# Altium PCB Electronic_load.PcbDoc
Units mm, origin at the board's own origin, x right, y up, seen from the top; angles counter-clockwise.
Board outline 100 x 79.9 mm, 2 copper layers (Top Layer, Bottom Layer), stack 1.671 mm thick; 68 components, 70 nets, 271 pads, 116 vias.
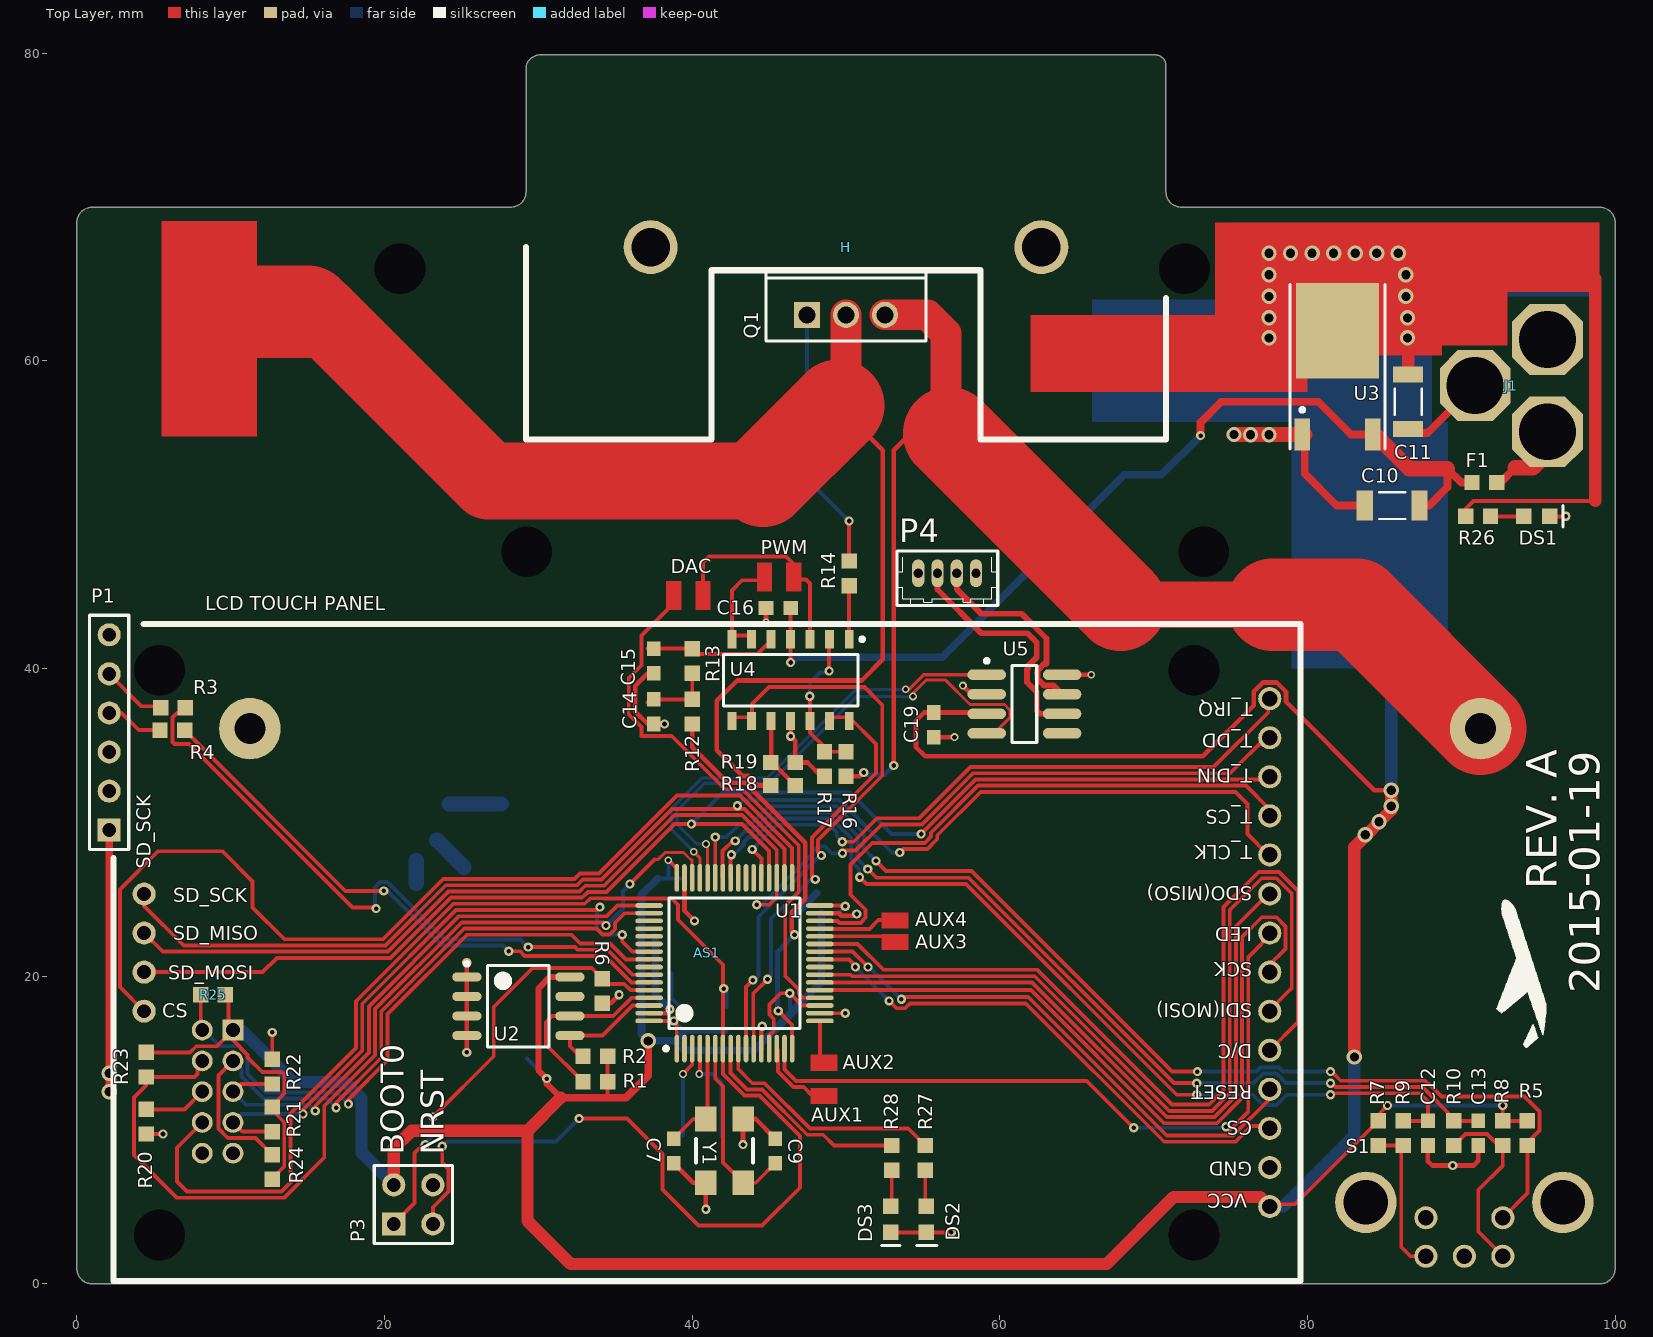
[diagram p0: Top Layer view]
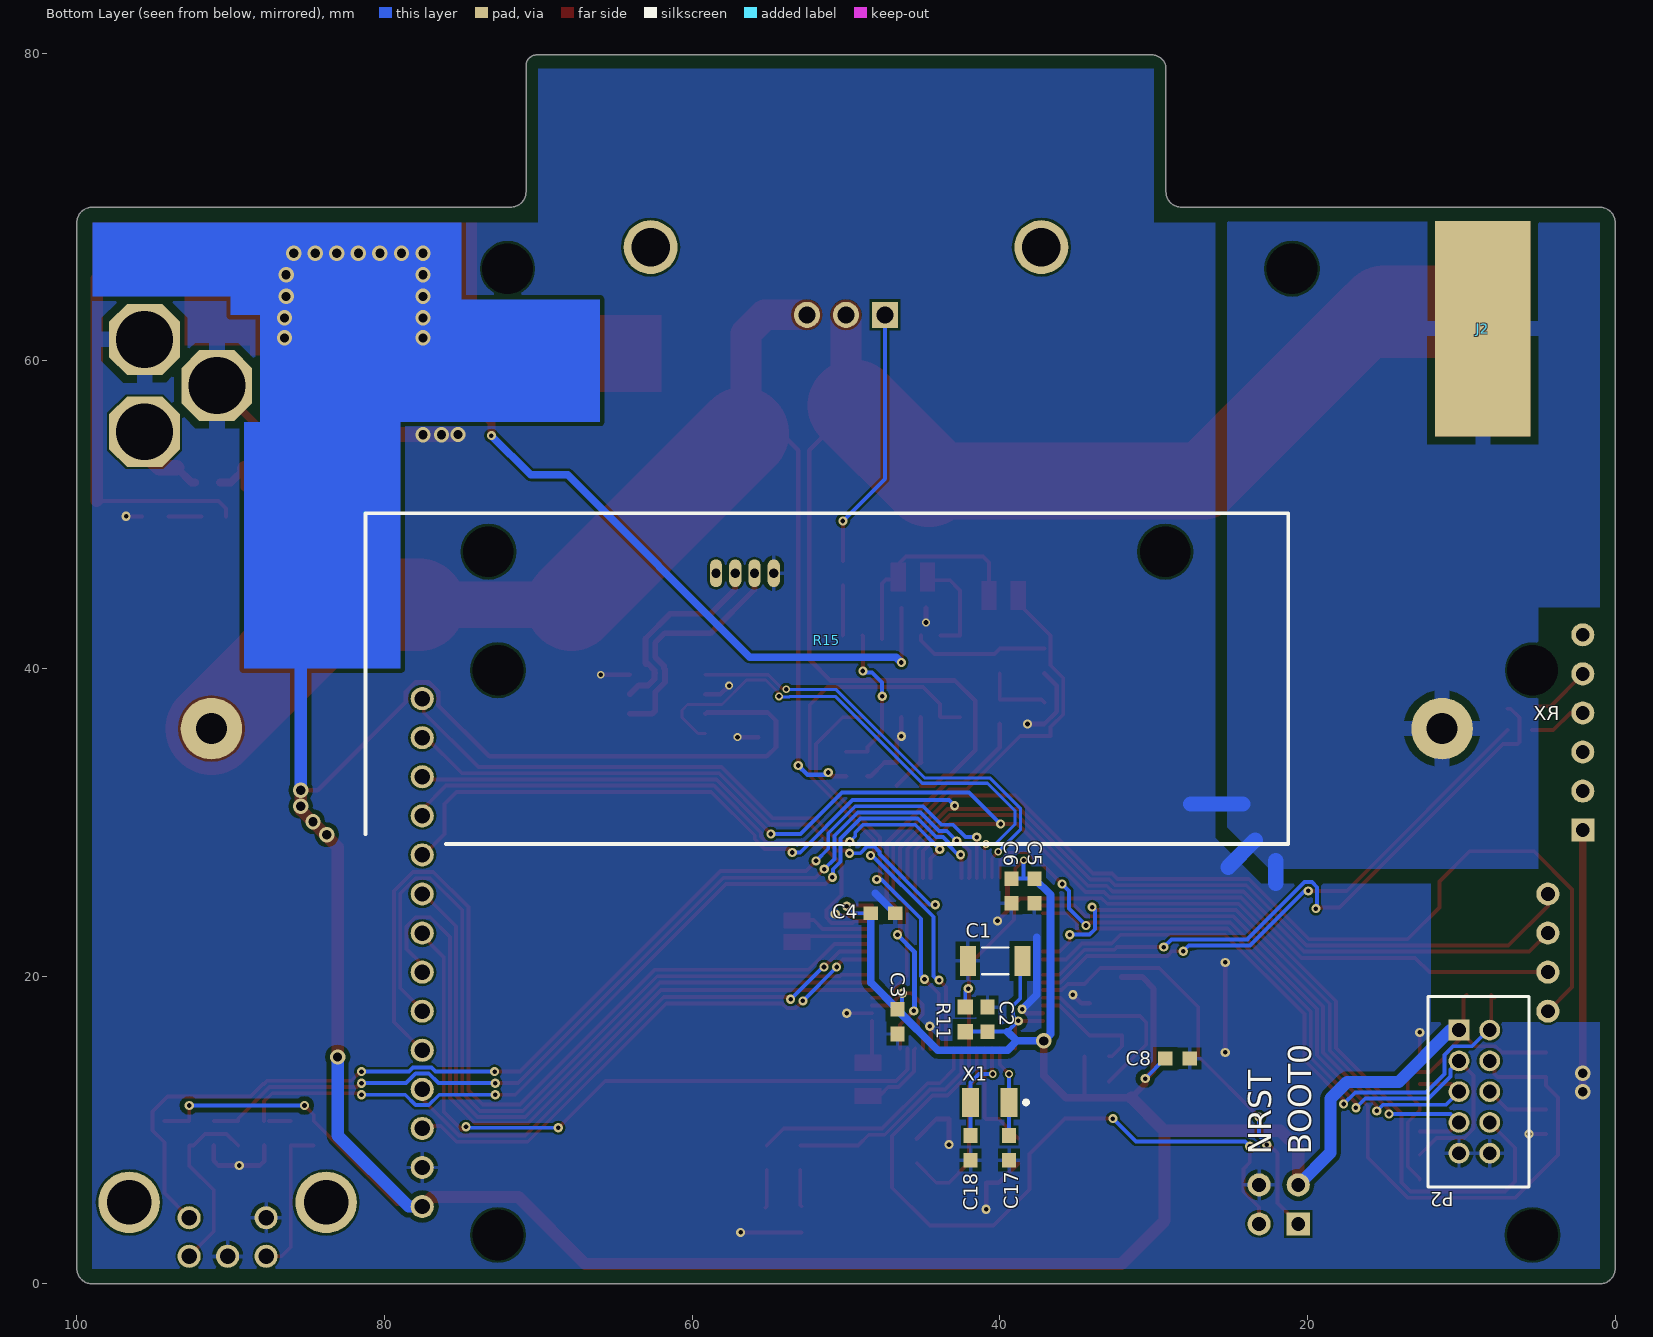
[diagram p1: Bottom Layer view, seen from below]

## Layer stack, top to bottom
Top Solder: solder mask 0.0102, Solder Resist, Dk 3.5
Top Layer: signal copper 0.0356
Dielectric 1: dielectric 1.6, FR-4, Dk 4.8
Bottom Layer: signal copper 0.0356
Bottom Solder: solder mask 0.0102, Solder Resist, Dk 3.5

## Board outline
1,0 cw(c1,1) 0,1 0,69 cw(c1,69) 1,70 28.2,70 ccw(c28.2,71) 29.2,71 29.2,79 cw(c30.1,79) 30.1,79.9 70.1,79.9 cw(c70.1,79.2) 70.8,79.2 70.8,71 ccw(c71.8,71) 71.8,70 99,70 cw(c99,69) 100,69 100,1 cw(c99,1) 99,0

## Design rules (kind name [scope] priority, off if disabled: settings)
Clearance Clearance_1 [InPolygon vs IsFill OR InPolygon OR InNet('3_3V')] p1: gap=0.3
Clearance [All] p2: gap=0.152
DiffPairsRouting [All] p1: maxlimit=0.254 minlimit=0.254 mostfreqgap=0.254 toplayer_minwidth=0.381 toplayer_maxwidth=0.381 toplayer_prefwidth=0.381 bottomlayer_minwidth=0.381 bottomlayer_maxwidth=0.381 bottomlayer_prefwidth=0.381 maxuncoupledlength=12.7
Height [All] p1: minheight=0 maxheight=100 prefheight=12.7
HoleSize [All] p1: absolutevalues=TRUE maxlimit=6.35 minlimit=0.3 maxpercent=80.000 minpercent=20.000
MinimumSolderMaskSliver [All] p1: minsoldermaskwidth=0.1
PolygonConnect PolygonConnect_2 [IsVia] p1: connectstyle=Direct reliefconductorwidth=0.254 reliefentries=4 polygonreliefangle="90 Angle" airgapwidth=0.254
PolygonConnect PolygonConnect_1 [InNet('GND') AND (InComponent('R15') OR InComponent('J2')  OR InComponent('J1'))] p2: connectstyle=Relief reliefconductorwidth=1 reliefentries=4 polygonreliefangle="90 Angle" airgapwidth=0.5
PolygonConnect [All] p3: connectstyle=Relief reliefconductorwidth=0.254 reliefentries=4 polygonreliefangle="90 Angle" airgapwidth=0.254
RoomDefinition Electronic_load_REVA [InComponentClass('Electronic_load_REVA')] p1: confinementstyle=ConfineOut formatcopy=TRUE lockcomponents=FALSE outline 108.2,89.3 197.2,89.3 197.2,113.1 108.2,113.1
RoutingVias [All] p1: holewidth=0.6 width=1 viastyle="Through Hole" minholewidth=0.3 minwidth=0.5 maxholewidth=6.3 maxwidth=7
SilkToSilkClearance [All] p1: silktosilkclearance=0
SilkToSolderMaskClearance [IsPad] p1: minsilkscreentomaskgap=0.2 clearancetoexposedcopper=TRUE
SolderMaskExpansion [All] p1: expansion=0.13
Width [All] p1: maxlimit=6 minlimit=0.152 preferedwidth=0.25
23 further rules are at their usual default settings.

## Classes and differential pairs
differential pair CAN: +CAN_P -CAN_N

## Components (designator, comment, footprint, x,y, rotation, side; value= is the part's Value field where it differs from the comment)
AS1 "LCD_TOUCH_DISPLAY" LCD_SPI 79.55,19 r90 top locked
C1 "Cap" 1206_CAP 40.3,21 r0 bottom
C2 "Cap" 0603_CAP 40.8,17.2 r90 bottom
C3 "Cap" 0603_CAP 46.65,17.05 r270 bottom
C4 "Cap" 0603_CAP 47.6,24.1 r180 bottom
C5 "Cap" 0603_CAP 37.75,25.55 r270 bottom
C6 "Cap" 0603_CAP 39.25,25.55 r270 bottom
C7 "Cap" 0603_CAP 38.8,8.65 r270 top
C8 "Cap" 0603_CAP 28.45,14.65 r0 bottom
C9 "Cap" 0603_CAP 45.4,8.65 r90 top
C10 "Cap" 1206_CAP 85.5,50.6 r180 top
C11 "Cap" 1206_CAP 86.55,57.35 r270 top
C12 "ap" 0603_CAP 87.825,9.8 r90 top
C13 "ap" 0603_CAP 91.1,9.8 r90 top
C14 "Cap" 0603_CAP 37.5,37.2 r90 top
C15 "Cap" 0603_CAP 37.5,40.5 r90 top
C16 "Cap" 0603_CAP 45.6,43.95 r180 top
C17 "Cap" 0603_CAP 39.4,8.85 r90 bottom
C18 "Cap" 0603_CAP 41.9,8.85 r90 bottom
C19 "Cap" 0603_CAP 55.7,36.35 r90 top
DS1 "APG1608CGKC/T" KING-LED0603-25-GREEN_V 94.9,49.9 r180 top
DS2 "KP-1608SYCK" KING-0603LED_YELLOW_V 55.224,4.2 r90 top
DS3 "KP-1608SYCK" KING-0603LED_YELLOW_V 52.9,4.2 r90 top
F1 "Fuse" 0603_RES 91.5,52.1 r180 top
H "HeatSink" Heat_Sink 50,67.4 r0 top locked
J1 "DC_JACK" DC_JACK_6.3MM 95.6,58.4 r180 top locked
J2 "Socket" PIN1 8.6,62.1 r0 top
P1 "USART1" HDR1X6 2.1,29.5 r90 top
P2 "LTMM-105-02-TX-D" SMTC-LTMM-105-02-XX-D 10.15,16.5 r270 bottom
P3 "Header 2X2" HDR2X2 20.6,3.9 r0 top
P4 "DF13-4P-1.25DSA" DF13-4P-1.25DSA 55.95,46.2 r0 top
Q1 "FQP19N20C" TO220V 50,63 r0 top locked
R1 "Res" 0603_RES 33.7,13.15 r180 top
R2 "Res" 0603_RES 33.7,14.8 r0 top
R3 "Res" 0603_RES 6.25,37.45 r0 top
R4 "Res" 0603_RES 6.2,36 r0 top
R5 "Res" 0603_RES 94.3,9.8 r90 top
R6 "Res" 0603_RES 34.15,19.05 r270 top
R7 "Res" 0603_RES 84.6,9.8 r90 top
R8 "Res" 0603_RES 92.7,9.8 r270 top
R9 "Res" 0603_RES 86.237,9.8 r90 top
R10 "Res" 0603_RES 89.512,9.8 r90 top
R11 "Res" 0603_RES 42.25,17.2 r270 bottom
R12 "Res" 0603_RES 40,37.2 r90 top
R13 "Res" 0603_RES 40,40.5 r90 top
R14 "Res" 0603_RES 50.2,46.2 r90 top
R15 "Res" 100W_RES 51.25,36.1 r0 bottom locked
R16 "Res" 0603_RES 50,33.8 r90 top
R17 "Res" 0603_RES 48.6,33.8 r90 top
R18 "Res" 0603_RES 45.9,32.4 r0 top
R19 "Res" 0603_RES 45.9,33.9 r0 top
R20 "Res" 0603_RES 4.5,10.55 r90 top
R21 "Res" 0603_RES 12.7,10.7 r90 top
R22 "Res" 0603_RES 12.7,13.8 r270 top
R23 "Res" 0603_RES 4.5,14.25 r270 top
R24 "Res" 0603_RES 12.7,7.6 r90 top
R25 "Res" 0603_RES 8.85,18.8 r180 top
R26 "Res" 0603_RES 91.1,49.9 r180 top
R27 "Res" 0603_RES 55.148,8.2 r90 top
R28 "Res" 0603_RES 52.976,8.2 r90 top
S1 "PEC12R-2xxxF-Sxxxx" ROTARY_ENCODER_VER 90.2,1.8 r0 top locked
U1 "STM32F103RCT6" LQFP64_N 42.75,20.85 r90 top locked
U2 "24LC32AT-I/SM" SOIJ-SM8_L 28.7,18.05 r0 top
U3 "NCP1117DT33RKG" TO-252 81.95,58.6 r0 top
U4 "LM324ADR2G" ONSC-SOIC-14-751A-03_V 46.4,39.25 r270 top
U5 "CAN bus transiver" SOIC127P600X175-8M 61.6,37.7 r0 top
X1 "ABS07-32.768KHz-T" ABRA-ABS07-2_V 40.65,11.8 r0 bottom
Y1 "ABM3B-25.000MHZ-B2-T" ABRA-ABM3B-4_V 42.1,8.65 r90 top

## Footprints (in the part's own frame and the unit in brackets; to place one, negate y for a bottom-side part, rotate by r counter-clockwise, add the part's x,y. Pads: shape width x height; smd on the part's side, far side on the other; paste and mask are expansions set on the pad)
100W_RES [mm]
  rrect50% 0x0 hole 3.3 unplated: 0(-22,-11.5) 0(22,-11.5)
  round 4 hole 2: 1(-40,0) 2(40,0)
  silkscreen extent -30,-14 30,7.5
0603_CAP [mm]
  rect 0.95x0.9 smd: 1(-0.8,0) 2(0.8,0)
  body extent -0.8,-0.39 0.8,0.41, height 0.7
0603_RES [mm] "Chip Resistor, 2-Leads, Body 1,57x0,85mm, IPC Medium Density"
  rect 1x1 smd: 1(-0.8,0) 2(0.8,0)
  body extent -0.85,-0.42 0.75,0.43, height 0.45
1206_CAP [mm] "Chip Capacitor, 2-Leads, Body 3,20x1,60mm, IPC Low Density"
  rect 1.05x1.95 smd: 1(-1.775,0) 2(1.775,0)
  silkscreen extent -0.85,-0.87 0.85,0.87, body extent -1.6,-0.8 1.6,0.8, height 1.6
ABRA-ABM3B-4_V [mil] "SMT Crystal, 4-Leads, Body 5.2x3.4mm"
  rect 63x55 smd: 1(-81.5,-47.5) 2(81.5,-47.5) 3(81.5,47.5) 4(-81.5,47.5)
  silkscreen extent -31,-72 31,72, body extent -114,-52 113,51, height 39
ABRA-ABS07-2_V [mm] "Hand Drawn, 2-Leads, Body 3.2x1.5mm, Pitch 2.5mm"
  rect 1.1x1.9 smd: 1(-1.25,0) 2(1.25,0)
  silkscreen extent -2.47,-0.12 -2.22,0.12, body extent -1.6,-0.75 1.6,0.75, height 0.9
DC_JACK_6.3MM [mm]
  oct 4.6x4.6 hole 3.7: 1(0,3) 2(0,-3) 3(4.7,0)
  body extent -6.4,-10.6 8,4.5, height 11
DF13-4P-1.25DSA [mm]
  oval 0.8x1.8 hole 0.6: 1(2.5,0) 2(1.25,0) 3(0,0) 4(-1.25,0)
  silkscreen extent -2.64,-2.13 3.91,1.45, body extent -2.68,-2.2 3.98,1.2, height 4.32
HDR1X6 [mm] "Connector; Header; 6 Position"
  rect 1.5x1.5 hole 0.9: 1(0,0)
  round 1.5 hole 0.9: 2(2.54,0) 3(5.08,0) 4(7.62,0) 5(10.16,0) 6(12.7,0)
  silkscreen extent -1.27,-1.27 13.97,1.27
HDR2X2 [mm] "Connector; Header; 2x2 Position"
  rect 1.5x1.5 hole 0.9: 1(0,0)
  round 1.5 hole 0.9: 2(0,2.54) 3(2.54,0) 4(2.54,2.54)
  silkscreen extent -1.27,-1.27 3.81,3.81
Heat_Sink [mm]
  round 3.5 hole 2.5: 0(-12.7,0) 0(12.7,0)
  silkscreen extent -20.8,-12.5 20.8,0, body extent -20.8,-12.6 20.8,12.53, height 63.5
KING-0603LED_YELLOW_V [mm] "SMT LED, 2-Leads, Body 1.6x0.8mm (0603-Size)"
  rect 1x1 smd paste+0 mask+0: 1(0.85,0) 2(-0.85,0)
  body extent -0.92,-0.53 1.09,0.53, height 1.1
KING-LED0603-25-GREEN_V [mm] "LED, SMT, Body 1.6 x 0.8 mm, 0.25mm Thickness"
  rect 1x1 smd paste+0 mask+0: 1(0.85,0) 2(-0.85,0)
  body extent -0.8,-0.4 0.8,0.4, height 0.25
LCD_SPI [mm] "http://www.ebay.co.uk/itm/240x320-2-4-SPI-TFT-LCD-Touch-Panel-Serial-Port-Module-with-PBC-ILI9341-5V-3-3V-/121414443081?pt=UK_BOI_Electrical_Components_Supplies_ET&hash=item1c44dd6049"
  round 0 hole 3.3 unplated: 0(-15.82,74.18) 0(-15.82,6.92) 0(20.9,74.18) 0(20.9,6.92)
  round 1.5 hole 1: 1(-13.97,2) 2(-11.43,2) 3(-8.89,2) 4(-6.35,2) 5(-3.81,2) 6(-1.27,2) 7(1.27,2) 8(3.81,2) 9(6.35,2) 10(8.89,2) 11(11.43,2) 12(13.97,2) 13(16.51,2) 14(19.05,2)
  round 1.5 hole 0.9: 15(-1.27,75.18) 16(1.27,75.18) 17(3.81,75.18) 18(6.35,75.18)
  silkscreen extent -18.82,0 23.9,77.18, body extent -18.85,-0.02 23.9,77.18, height 6
LQFP64_N [mm] "Thin QFP, 64-Leads, Body 10x10mm, Pitch 0.5mm, IPC Medium Density"
  oval 1.8x0.3 smd mask+0.05: 1(-5.55,3.75) 2(-5.55,3.25) 3(-5.55,2.75) 4(-5.55,2.25) 5(-5.55,1.75) 6(-5.55,1.25) 7(-5.55,0.75) 8(-5.55,0.25) 9(-5.55,-0.25) 10(-5.55,-0.75) 11(-5.55,-1.25) 12(-5.55,-1.75) 13(-5.55,-2.25) 14(-5.55,-2.75) 15(-5.55,-3.25) 16(-5.55,-3.75) 33(5.55,-3.75) 34(5.55,-3.25) 35(5.55,-2.75) 36(5.55,-2.25) 37(5.55,-1.75) 38(5.55,-1.25) 39(5.55,-0.75) 40(5.55,-0.25) 41(5.55,0.25) 42(5.55,0.75) 43(5.55,1.25) 44(5.55,1.75) 45(5.55,2.25) 46(5.55,2.75) 47(5.55,3.25) 48(5.55,3.75)
  oval 0.3x1.8 smd mask+0.05: 17(-3.75,-5.55) 18(-3.25,-5.55) 19(-2.75,-5.55) 20(-2.25,-5.55) 21(-1.75,-5.55) 22(-1.25,-5.55) 23(-0.75,-5.55) 24(-0.25,-5.55) 25(0.25,-5.55) 26(0.75,-5.55) 27(1.25,-5.55) 28(1.75,-5.55) 29(2.25,-5.55) 30(2.75,-5.55) 31(3.25,-5.55) 32(3.75,-5.55) 49(3.75,5.55) 50(3.25,5.55) 51(2.75,5.55) 52(2.25,5.55) 53(1.75,5.55) 54(1.25,5.55) 55(0.75,5.55) 56(0.25,5.55) 57(-0.25,5.55) 58(-0.75,5.55) 59(-1.25,5.55) 60(-1.75,5.55) 61(-2.25,5.55) 62(-2.75,5.55) 63(-3.25,5.55) 64(-3.75,5.55)
  silkscreen extent -5.67,-4.25 4.25,4.57, body extent -5,-5 5,5, height 1.6
ONSC-SOIC-14-751A-03_V [mm] "SOIC, 14-Leads, Body 8.75x4mm, Pitch 1.27mm"
  rect 1.18x0.58 smd: 1(-2.66,3.81) 2(-2.66,2.54) 3(-2.66,1.27) 4(-2.66,0) 5(-2.66,-1.27) 6(-2.66,-2.54) 7(-2.66,-3.81) 8(2.66,-3.81) 9(2.66,-2.54) 10(2.66,-1.27) 11(2.66,0) 12(2.66,1.27) 13(2.66,2.54) 14(2.66,3.81)
  silkscreen extent -2.78,-4.38 1.67,4.78, body extent -2,-4.38 2,4.38, height 1.75
PIN1 [mm] "Connector; Plug"
  rect 6.2x14 smd far side: 1(0,0)
ROTARY_ENCODER_VER [mm]
  round 4 hole 2.9: 0(-6.4,3.5) 0(6.4,3.5)
  round 1.5 hole 1: 1(-2.5,2.5) 2(2.5,2.5) A(-2.5,0) B(2.5,0) C(0,0)
SMTC-LTMM-105-02-XX-D [mm] "Shrouded Header & Stacker, 2x5 Pins, Vertical, 2mm Pitch, Male"
  rect 1.35x1.35 hole 0.9: 1(0,0)
  round 1.35 hole 0.9: 2(0,2) 3(2,0) 4(2,2) 5(4,0) 6(4,2) 7(6,0) 8(6,2) 9(8,0) 10(8,2)
  silkscreen extent -2.19,-2.01 10.19,4.55, body extent -2.19,-2.01 10.19,4.52, height 4.83
SOIC127P600X175-8M [mm] "SOIC, 8-Leads, Body 4,90x3,90mm, Pitch 1,27mm, IPC Low Density"
  oval 2.5x0.7 smd: 1(-2.45,1.905) 2(-2.45,0.635) 3(-2.45,-0.635) 4(-2.45,-1.905) 5(2.45,-1.905) 6(2.45,-0.635) 7(2.45,0.635) 8(2.45,1.905)
  silkscreen extent -2.57,-2.5 0.8,2.93, body extent -2,-2.5 2,2.5, height 1.75
SOIJ-SM8_L [mm] "SOP, 8-Leads, Body 5.2x5.2mm, Pitch 1.27mm, IPC High Density"
  oval 1.9x0.6 smd: 1(-3.35,1.905) 2(-3.35,0.635) 3(-3.35,-0.635) 4(-3.35,-1.905) 5(3.35,-1.905) 6(3.35,-0.635) 7(3.35,0.635) 8(3.35,1.905)
  silkscreen extent -3.47,-2.65 2,2.88, body extent -2.69,-2.67 2.69,2.67, height 2.04
TO220V [mm] "TO, Thru-Hole, Vertical, Heatsink Mounted; 3 In-Line Leads; Pitch 2.54 mm; Pin sequence 1, 3, 2"
  round 1.7 hole 1.1: D(0,0) S(2.54,0)
  rect 1.7x1.7 hole 1.1: G(-2.54,0)
  silkscreen extent -5.2,-1.7 5.2,2.9, body extent -5.21,-1.46 5.21,3, height 18.8
TO-252 [mm] "D-PAK/TO-252-AA; 3 Leads (1 Cropped); Body 10.1 (inc. leads) x 6.6 mm (LxW max)"
  rect 1x2.1 smd: 1(-2.285,-3.375) 3(2.285,-3.375)
  rect 5.4x6.2 smd: 4(0,3.375)
  silkscreen extent -3.09,-4.32 3.09,6.38

## Part data
AS1: library part LCD_SPI, "http://www.ebay.co.uk/itm/240x320-2-4-SPI-TFT-LCD-Touch-Panel-Serial-Port-Module-with-PBC-ILI9341-5V-3-3V-/121414443081?pt=UK_BOI_Electrical_Components_Supplies_ET&hash=item1c44dd6049"
C1 C2 C3 C4 C5 C6 C7 C8 C9 C10 C11 C14 C15 C16 C17 C18: "Capacitor"
C12 C13: library part Cap, "Capacitor"
DS1: library part CMP-0239-00001-1, "LED, SMT, 0603(1608), 0.25mm Thickness, Green"
DS2 DS3: library part CMP-0404-00003-1, "LED, SMT, 0603(1608), 1.1mm thickness, Yellow"
P1: library part "Header 6", "Header, 6-Pin"
P2: library part CMP-1028-00010-1, "Shrouded Header & Stacker, Through-Hole, Vertical, -55 to 105 degC, 2 mm Pitch, 10-Pin, Male, RoHS"
P3: "Header, 2-Pin, Dual row"
Q1: library part "MOSSFET N-Channel", "N-channel MOSFET"
U1: library part CMP-0237-00009-2, "STM32 ARM-based 32-bit MCU Performance Line with 256 kB Flash, 48 kB Internal RAM, -40 to +85°C Temperature, 64-Pin LQFP, Tray"
U2: library part CMP-0159-00548-1, "32Kbit, 400kHz, 2.5V, I2C Serial EEPROM, 8-Pin SOIC 208mil, Industrial Temperature, Tape and Reel"
U3: library part Linear
U4: library part CMP-1310-00169-1, "Single Supply Quad Operational Amplifier, 3 to 32 V, 0 to 70 degC, 14-Pin SOIC, Pb-Free, Tape and Reel"
U5: library part MAX3051
X1: library part CMP-0447-00001-2, "Crystal, 32.768 kHz, 12.5 pF, -40 to 85 degC, SMD Low Profile 3.2 x 1.5 x 0.9 mm, Tape and Reel"
Y1: library part CMP-0277-00001-1, "Crystal, SMD, 25.000000MHz Stab=50ppm 18.0pF"

## Free pads (board coordinates)
  round 0 hole 3.3 unplated: 2(21,66) 4(72,66)

## Via types
v1: diameter 0.6, hole 0.3, Top Layer to Bottom Layer, tented both sides, 79 vias
v2: diameter 1, hole 0.6, Top Layer to Bottom Layer, tented both sides, 26 vias
v3: diameter 0.5, hole 0.3, Top Layer to Bottom Layer, tented both sides, 11 vias

## Nets (pads, with @x,y where several pads share a name; then routed paths per layer and width w, separated by ;. In a path a pad name is that pad's centre, name@x,y a point inside that pad or via, vN(x,y) a via of type N, cw(c..) or ccw(c..) an arc to the next point about the centre after c; other vN are vias at no path point)
3_3V: AS1.1 C1.1 C2.1 C3.1 C4.1 C5.1 C6.1 C8.2 C11.1 C19.2 P2.1 P3.2 R1.1 R2.2 R5.2 R7.2 R8.1 R11.2 R21.2 R23.1 R24.1 R25.1 R26.2 U1.1 U1.13 U1.19 U1.32 U1.48 U1.64 U2.8 U3.4 U5.3 | length 319.4
  Top Layer w0.25: R23.1 7.353,15.05 7.756,15.452 9.102,15.452 P2.1@9.85,16.2 ; R25.1 9.85,18.6 P2.1@9.85,16.2 ; R24.1 12.7,6.845 13.477,7.623 13.477,10.515 12.7,11.292 R21.2 12.7,11.608 13.477,12.385 13.477,13.615 13.315,13.777 12.05,13.777 11.102,14.725 11.102,14.894 10.15,15.847 P2.1 P2.1@9.85,16.2 ; 34.5,12.1 R1.1 R2.2 ; U1.64 v1(38.8,17.1) 39,16.9 U1.1 ; v3(38.45,27.55) 39,27 U1.48 ; U1.13 45,16.154 45.3,16.454 45.3,17.233 45.023,17.511 45.023,18.173 45.75,18.9 v1(46.35,18.9) 47.15,18.1 U1.19 ; U1.32 49.9,24.6 v1(49.95,24.55) ; AS1.1@77.7,5.18 79.18,5.18 R7.2 84.6,11 v1(85.2,11.6) ; R26.2 90.3,50.4 90.8,50.9 98.7,50.9 ; v1(92.7,11.6) R8.1 R5.2
  Top Layer w0.3: U5.3 59.065,37.15 C19.2 55.1,37.15 54.55,36.6 54.55,34.9 55.15,34.3 73.2,34.3 76.506,37.606 76.498,37.614 76.498,38.486 77.114,39.102 77.986,39.102 78.602,38.486 78.602,37.848 84.35,32.1 v2(85.45,32.1)
  Top Layer w0.4: 31.45,12.1 30.55,13 v1(30.55,13.35) 30,13.9 30,19.2 30.755,19.955 U2.8
  Top Layer w0.5: 31.45,12.1 34.5,12.1 35.7,12.1 37.15,13.55 v2(37.15,15.8)
  Top Layer w0.8: P3.2 20.6,8.8 21.75,9.95 29.3,9.95 ; 31.45,12.1 29.3,9.95 ; AS1.1@77.7,5.18 AS1.1 76.93,5.65 71.3,5.65 66.95,1.3 32.1,1.3 29.3,4.1 29.3,9.95 ; v2(83.05,14.75) 83.05,28.4 85.45,30.8 v2(85.45,31.05) v2(85.45,32.1) ; C11.1 86.55,60.65 ; 98.55,65.5 98.7,65.35 98.7,50.9
  Bottom Layer w0.25: C8.2 v1(30.55,13.35) ; C5.1 38.5,26.35 ; v3(38.45,27.55) 38.45,26.4 38.5,26.35 ; C1.1@38.675,20.2 38.675,18.546 39.13,18.092 39.13,17.43 v1(38.8,17.1) 39.5,16.4 C2.1 R11.2 ; C6.1 38.5,26.35 ; C3.1@46.35,17.9 v1(46.35,18.9) ; C4.1 49.5,24.1 v1(49.95,24.55) ; v1(85.2,11.6) v1(92.7,11.6)
  Bottom Layer w0.5: C5.1 36.7,25.3 36.7,16.25 v2(37.15,15.8) 38.9,15.8 ; 39.5,16.4 38.9,15.8 ; C4.1 48.4,19.6 C3.1 46.65,17.807 44.043,15.2 39.5,15.2 38.9,15.8
  Bottom Layer w0.8: P2.1 10.7,16.5 14.068,13.132 17.423,13.132 18.502,12.053 18.502,8.538 P3.2 ; AS1.1 78.43,5.03 83.05,9.65 v2(83.05,14.75) ; v2(85.45,32.1) 85.45,41.65
  other v2: 83.75,29.2 84.65,30.05 77.5,61.5 86.5,61.5 77.5,62.8 86.5,62.8 77.5,64.2 86.4,64.2 77.5,65.6 86.4,65.6 77.5,67 78.9,67 80.3,67 81.7,67 83.1,67 84.5,67 85.9,67
5V: P1.3
12V_DC: C10.1 C16.1 F1.2 U3.3 U4.4 | length 61.1
  Top Layer w0.25: v1(46.4,40.4) U4.4 C16.1
  Top Layer w0.5: v1(73.05,55.15) 73.05,56 74.4,57.35 80.7,57.35 82.825,55.225 U3.3@84.385,55.225 ; C10.1 87.9,50.6 89.1,51.8 89.1,53 90,52.1 F1.2
  Top Layer w1: U3.3@84.385,55.225 86.61,53 89.1,53
  Bottom Layer w0.5: v1(46.4,40.4) 46.75,40.75 56.25,40.75 68.1,52.6 70.5,52.6 v1(73.05,55.15)
AUX1: U1.14 | length 4.4
  Top Layer w0.25: U1.14 45.573,15.227 45.573,13.808 46.583,12.798 47.252,12.798 47.8,12.25
AUX2: U1.17 | length 2.6
  Top Layer w0.25: 48.3,14.5 U1.17
AUX3: U1.28 | length 4.2
  Top Layer w0.25: U1.28 52.45,22.6
AUX4: U1.29 | length 5.1
  Top Layer w0.25: U1.29 48.33,23.07 51.52,23.07 52.1,23.65 53.15,23.65
BOOT0: P3.1 R6.1 U1.60 | length 28.6
  Top Layer w0.25: P3.1 21.95,5.25 21.95,8.5 22.5,9.05 v1(22.65,9.05) ; v1(23.15,10.85) 27.1,14.8 27.1,18 29.632,20.532 33.468,20.532 R6.1 34.5,19.5 35.581,19.5 35.981,19.1 U1.60
  Bottom Layer w0.25: v1(22.65,9.05) 22.65,9.15 23.15,9.65 v1(23.15,10.85)
CAN_N: P4.3 U5.6 | length 15.6
  Top Layer w0.381: P4.3 55.95,45.15 58.8,42.3 61.8,42.3 62.4,41.7 62.4,40.733 61.822,40.155 61.822,40.02 61.765,39.963 61.765,39.112 62.4,38.477 62.4,37.265 62.6,37.065 U5.6
CAN_P: P4.2 U5.7 | length 13.2
  Top Layer w0.381: P4.2 57.2,45.17 58.8,43.57 61.428,43.57 63.035,41.963 63.035,40.335 62.998,40.298 62.863,40.298 62.457,39.892 62.457,39.757 62.4,39.7 62.457,39.643 62.457,39.318 62.863,38.912 63.473,38.912 U5.7
CANRX: U1.44 U5.4 | length 34.1
  Top Layer w0.2: v3(40.9,28.6) 41,28.5 U1.44 ; v3(54.355,38.195) 54.355,38.407 55.201,39.253 56.48,39.253 58.066,37.667 60.3,37.667 60.652,37.315 60.652,36.815 59.632,35.795 U5.4
  Bottom Layer w0.2: v3(40.9,28.6) 40.3,28.6 39,29.9 39,30.75 40.798,32.548 45.046,32.548 50.693,38.195 53.645,38.195 53.686,38.154 54.314,38.154 v3(54.355,38.195)
CANTX: U1.45 U5.1 | length 29.4
  Top Layer w0.2: v3(40.1,28.1) 40.5,27.7 U1.45 ; v3(53.894,38.656) 54.106,38.656 55.055,39.605 U5.1
  Bottom Layer w0.2: v3(40.1,28.1) 38.648,29.552 38.648,30.896 40.652,32.9 44.9,32.9 50.656,38.656 v3(53.894,38.656)
CTS: P1.2
CURR_DAC: U1.20 | length 35
  Top Layer w0.25: 38.65,44.1 36.698,42.148 36.698,41.133 36.7,41.131 36.7,40.217 35.873,39.39 35.873,37.023 36.7,36.196 36.7,35.623 38.673,35.623 42.141,32.155 43.264,32.155 46.927,28.492 46.927,25.473 46.05,24.596 46.05,20.017 46.927,19.139 46.927,18.892 47.219,18.6 U1.20
CURR_MES: U1.11 U4.13 U4.14 | length 27.2
  Top Layer w0.25: U1.11 44,16.483 43.973,16.511 43.973,18.873 v1(44.9,19.8) ; v1(48,26.3) 47.782,26.518 47.782,29.032 51.95,33.2 51.95,35.1 50.21,36.84 U4.13@48.94,36.84
  Bottom Layer w0.25: v1(44.9,19.8) 45.123,20.023 45.123,23.74 47.683,26.3 v1(48,26.3)
CURR_PWM: R12.1 U1.16 | length 26.1
  Top Layer w0.25: v1(45.6,17.75) 46.5,16.85 U1.16
  Top Layer w0.3: R12.1 40,34.9 42.318,32.582 43.441,32.582 47.355,28.669 47.355,25.045 46.477,24.167 46.477,22.872 v1(46.65,22.7)
  Bottom Layer w0.25: v1@45.55,17.8 v1(45.6,17.75)
  Bottom Layer w0.3: v1@45.55,17.8 45.55,21.6 v1(46.65,22.7)
DC: AS1.5 U1.27 | length 60.3
  Top Layer w0.25: U1.27 50.75,22.1 52.42,20.43 62.408,20.43 71.183,11.655 73.617,11.655 74.545,12.583 74.545,24.495 76.83,26.78 78.142,26.78 79.382,25.54 79.382,17.022 AS1.5
EN_A: C12.2 R9.2 U1.41 | length 60
  Top Layer w0.25: U1.41 42.5,27.85 v1(42.55,27.9) ; v1(50.886,26.436) 51.322,26 57.8,26 71.5,12.3 v1(72.8,12.3) ; v1(81.5,12.3) 81.6,12.4 81.9,12.4 87.3,12.4 87.825,11.875 C12.2 ; R9.2@86.1,10.6 R9.2 C12.2@87.5,10.6
  Bottom Layer w0.25: v1(42.55,27.9) 42.717,27.9 43.377,28.561 43.377,28.727 43.7,29.05 44.131,29.05 45.333,30.252 49.067,30.252 50.35,28.969 50.35,27.45 50.841,26.959 50.841,26.481 v1(50.886,26.436) ; v1(72.8,12.3) 76.447,12.3 77.124,11.623 77.976,11.623 78.653,12.3 v1(81.5,12.3)
EN_B: C13.2 R10.2 U1.42 | length 61.7
  Top Layer w0.25: U1.42 41.973,26.427 41.973,28.139 42.633,28.8 v1(42.8,28.8) ; v1(51.418,26.968) 51.984,26.402 57.967,26.402 71.317,13.052 v1(72.802,13.052) ; v1(81.5,13.052) 81.564,13.052 81.814,12.802 87.467,12.802 89.512,10.757 R10.2 C13.2
  Bottom Layer w0.25: v1(42.8,28.8) 43.452,29.452 43.964,29.452 45.167,30.655 49.233,30.655 50.752,29.136 50.752,27.634 v1(51.418,26.968) ; v1(72.802,13.052) 76.499,13.052 77.124,13.677 77.976,13.677 78.601,13.052 v1(81.5,13.052)
EN_SW: R5.1 S1.2 U1.43 | length 74
  Top Layer w0.25: U1.43 v1(41.5,29.05) ; v1(51.95,27.5) 52.601,26.849 58.151,26.849 71.195,13.805 v1(72.845,13.805) ; v1(81.5,13.805) 81.564,13.805 82.164,13.205 87.633,13.205 87.838,13 87.9,13 88.723,12.177 94.115,12.177 95.077,11.215 95.077,9.985 94.3,9.208 R5.1 94.3,5.9 S1.2
  Bottom Layer w0.25: v1(41.5,29.05) 42.233,29.05 43.038,29.855 43.798,29.855 45,31.057 49.4,31.057 51.155,29.302 51.155,28.295 v1(51.95,27.5) ; v1(72.845,13.805) 76.683,13.805 76.958,14.08 78.142,14.08 78.417,13.805 v1(81.5,13.805)
GND: AS1.2 C1.2 C2.2 C3.2 C4.2 C5.2 C6.2 C7.2 C8.1 C9.2 C10.2 C11.2 C12.1 C13.1 C14.1 C15.1 C16.2 C17.1 C18.1 C19.1 DS1.2 DS2.2 DS3.2 J1.2 J1.3 J2.1 P1.1 P2.9 P2.10 P3.4 P4.4 R6.2 R15.1 R17.1 R19.2 R20.1 R22.1 S1.1 S1.C U1.12 U1.18 U1.31 U1.47 U1.63 U2.1 U2.2 U2.3 U2.4 U3.1 U4.11 U5.2 U5.8 Y1.2 Y1.4 | length 110.5
  Top Layer w0.25: R20.1 v1(5.6,9.75) ; R22.1 v1(12.7,16.35) ; U1.18 v1(49.95,17.6) ; DS3.2 DS2.2 v1(56.85,3.35) ; DS1.2 v1(96.8,49.9)
  Top Layer w0.3: v1(25.35,15.05) v1(25.35,20.9) ; U2.3 v1(25.35,20.9) ; U2.2 v1(25.35,20.9) ; U2.1 v1(25.35,20.9) ; R6.2 34.7,18.25 v1(35.25,18.8) ; C15.1@37.1,39.7 36.3,38.9 36.3,37.2 37.1,36.4 v1(38.2,36.4) ; U1.63 38.3,17.6 v1(38.552,17.852) ; C7.2 40.07,6.58 Y1.4 v1(40.893,4.856) ; U1.47 39.5,24.25 v1(40.15,23.6) ; v1(43.306,9.056) Y1.2 44.13,10.72 C9.2 ; v1@44.4,16.7 44.5,16.6 U1.12 ; v3(44.8,43) C16.2 ; U4.11@46.4,36.84 v1(46.4,35.6) 46.7,35.3 R19.2 47.5,33.9 48.4,33 R17.1 ; U1.31 49.548,24.1 49.7,23.948 50.598,23.948 v1(50.7,24.05) ; C19.1 v3(57.05,35.55) ; v3(57.6,38.9) 58.165,38.335 U5.2 ; U5.8 v3(65.945,39.605) ; C12.1 87.825,7.975 88.1,7.7 90.8,7.7 91.1,8 C13.1
  Top Layer w0.5: v2(2.1,12.5) P1.1 ; U3.1@79.815,55.225 79.815,52.685 81.9,50.6 C10.2 ; C11.2@87.2,55.325 87.825,55.325 J1.3
  Top Layer w1: v2(75.225,55.225) U3.1@79.815,55.225
  Bottom Layer w0.3: v1(38.552,17.852) v1@38.555,17.85 ; v1@44.4,16.7 v1@44.45,16.75
  Bottom Layer w0.5: 37.598,22.548 37.598,18.807 v1(38.552,17.852) ; C4.2 48.1,25.4
  Bottom Layer w1: 22.05,26.05 22.05,27.5 ; 23.4,28.85 25.15,27.1 ; 24.2,31.2 27.6,31.2
  other v1: 89.45,7.7 44.55,16.75
  other v2: 2.1,13.7 76.3,55.2 77.5,55.2
LCD_CS: AS1.3 U1.25 | length 35.1
  Top Layer w0.25: U1.25 50.2,21.1 50.695,20.605 v1(50.612,20.605) ; v1(52.8,18.4) 53.277,17.923 53.839,17.923 54.156,18.239 61.689,18.239 70.688,9.24 75.329,9.24 76.348,10.26 77.4,10.26 AS1.3
  Bottom Layer w0.25: v1(50.612,20.605) 50.612,20.588 v1(52.8,18.4)
LCD_LED: AS1.8 U1.15 | length 46.1
  Top Layer w0.25: U1.15 46,13.95 46.75,13.2 65.65,13.2 v1(68.7,10.15) ; v1(74.706,10.22) 74.881,10.045 74.995,10.045 76.155,11.205 76.155,21.255 AS1.8@77.86,22.96
  Bottom Layer w0.25: v1(68.7,10.15) 74.636,10.15 v1(74.706,10.22)
LCD_RESET: AS1.4 U1.26 | length 35.9
  Top Layer w0.25: U1.26 50.433,21.6 v1(51.429,20.605) ; v1(53.6,18.5) 53.75,18.65 61.848,18.65 70.855,9.643 75.162,9.643 77.55,12.031 AS1.4
  Bottom Layer w0.25: v1(51.429,20.605) 51.495,20.605 v1(53.6,18.5)
LED1: R28.2 U1.8 | length 14
  Top Layer w0.25: U1.8 42.5,13.721 43.574,12.648 44.533,12.648 47.483,9.698 48.521,9.698 49.219,9 R28.2
LED2: R27.2 U1.9 | length 15.5
  Top Layer w0.25: U1.9 43,13.955 43.905,13.05 44.7,13.05 47.65,10.1 54.048,10.1 R27.2
MISO1: AS1.9 U1.22 | length 45.2
  Top Layer w0.25: U1.22 62.1,19.6 70.85,10.85 73.95,10.85 75.35,12.25 75.35,23.25 AS1.9@77.45,25.35
MISO2: AS1.13 AS1.17 U1.35 | length 89
  Top Layer w0.25: AS1.17 5.58,21.6 20.231,21.6 24.148,25.517 32.686,25.517 33.051,25.882 34.27,25.882 38.866,30.477 43.234,30.477 45.5,28.212 U1.35 45.5,25.15 45,24.65 v1(44.2,24.65) ; v1(49.773,27.998) 49.948,28.172 50.622,28.172 52.326,29.876 54.938,29.876 58.259,33.198 74.967,33.198 AS1.13@77.429,35.66
  Bottom Layer w0.25: v1(44.2,24.65) 44.531,24.65 47.823,27.942 47.823,28.089 48.161,28.427 48.639,28.427 49.069,27.998 v1(49.773,27.998)
MOSI1: AS1.6 U1.23 | length 56.2
  Top Layer w0.25: U1.23 50.3,20.1 50.398,20.002 62.267,20.002 71.017,11.252 73.783,11.252 74.948,12.417 74.948,24.301 77.024,26.377 77.976,26.377 78.98,25.373 78.98,19.243 77.55,17.813 AS1.6
MOSI2: AS1.12 AS1.16 U1.36 | length 88.1
  Top Layer w0.25: AS1.16 12.07,20.27 12.998,21.198 20.398,21.198 24.314,25.114 32.852,25.114 33.218,25.48 34.437,25.48 38.857,29.9 v1(39.95,29.9) 43.243,29.9 45,28.143 U1.36 ; v1(54.881,29.25) 58.426,32.795 77.275,32.795 AS1.12@77.45,32.97
  Bottom Layer w0.25: v1(39.95,29.9) 42,31.95 50.25,31.95 52.95,29.25 v1(54.881,29.25)
NetC7_1: C7.1 U1.5 Y1.3 | length 7.2
  Top Layer w0.25: C7.1 40.07,10.72 Y1.3 41,10.827 U1.5
NetC9_1: C9.1 U1.6 Y1.1 | length 12.1
  Top Layer w0.25: U1.6 41.5,13.35 42,12.85 42,7.886 Y1.1 44.13,6.58 C9.1
NetC14_2: C14.2 R12.2 R13.1 | length 4.7
  Top Layer w0.25: C14.2@37.1,37.8 37.3,38 R12.2 R13.1
NetC15_2: C15.2 R13.2 U4.5 | length 8.9
  Top Layer w0.25: C15.2@37.1,41.3 R13.2 40.35,40.95 44.25,40.95 45.13,41.83 U4.5@45.13,42.16
NetDS1_1: DS1.1 R26.1 | length 2.1
  Top Layer w0.25: R26.1 DS1.1
NetDS2_1: DS2.1 R27.1 | length 2.5
  Top Layer w0.25: R27.1 55.148,5.026 DS2.1@55.224,4.95
NetDS3_1: DS3.1 R28.1 | length 2.4
  Top Layer w0.25: DS3.1 52.976,5.126 R28.1
NetF1_1: F1.1 J1.1 | length 5.5
  Top Layer w0.5: F1.1 92.55,52.1 93.5,53.05
  Top Layer w1: 93.5,53.05 94.65,53.05 95.6,54 J1.1
NetQ1_G: Q1.G R14.2 | length 17.1
  Top Layer w0.25: R14.2 v1(50.2,49.6)
  Bottom Layer w0.25: Q1.G 47.46,52.34 v1(50.2,49.6)
NetQ1_S: Q1.S R15.2 R16.1 | length 81.6
  Top Layer w0.3: R16.1 50.9,33 v1(51.15,33.25) ; v1(53.1,33.7) 53.1,54.2 54.2,55.3 56.7,55.3
  Top Layer w2: Q1.S 55.3,63 56.5,61.8 56.5,55.5 56.7,55.3
  Top Layer w3: 67.85,44.15 77.75,44.15
  Top Layer w6: 56.7,55.3 67.85,44.15 ; 77.75,44.15 83.2,44.15 R15.2
  Bottom Layer w0.3: v1(51.15,33.25) 51.3,33.1 52.5,33.1 v1(53.1,33.7)
NetR3_2: R3.2 U1.58 | length 42.2
  Top Layer w0.25: R3.2@7,37.392 6.792,37.392 6.223,36.823 6.223,35.227 6.35,35.1 7.3,35.1 17.923,24.477 19.373,24.477 v1(19.45,24.4) ; v1(29.35,21.9) 32.381,21.9 32.556,21.725 34.494,21.725 36.119,20.1 U1.58
  Bottom Layer w0.25: v1(19.45,24.4) 19.373,24.477 19.373,25.789 19.711,26.127 20.189,26.127 23.899,22.418 23.899,22.402 28.848,22.402 v1(29.35,21.9)
NetR4_2: R4.2 U1.59 | length 37
  Top Layer w0.25: R4.2 17.45,25.55 v1(19.95,25.55) ; v1(28.082,21.632) 28.801,21.632 29.111,21.323 34.327,21.323 36.05,19.6 U1.59
  Bottom Layer w0.25: v1(19.95,25.55) 20.182,25.55 23.732,22 27.714,22 v1(28.082,21.632)
NetR7_1: R7.1 R9.1 S1.A | length 9.9
  Top Layer w0.25: R7.1 86.1,9 86.1,2.4 86.7,1.8 S1.A
NetR8_2: R8.2 R10.1 S1.B | length 12.3
  Top Layer w0.25: R10.1 90.265,9.752 91.665,9.752 92.417,9 R8.2 92.7,7.7 91.1,6.1 91.1,3.4 S1.B
NetR14_1: R14.1 U4.1 | length 3.2
  Top Layer w0.25: R14.1 50.2,42.17 U4.1@50.21,42.16
NetR16_2: R16.2 R17.2 U4.2 U4.12 | length 10.2
  Top Layer w0.25: v1(47.65,38.2) 47.67,38.18 47.67,36.84 47.67,35.83 48.6,34.9 R17.2 R16.2 ; v1(48.9,39.85) 48.9,42.12 U4.2@48.94,42.16
  Bottom Layer w0.25: v1(47.65,38.2) 47.65,39.1 48.3,39.75 48.8,39.75 v1(48.9,39.85)
NetR18_2: R18.2 R19.1 U4.10 | length 5.2
  Top Layer w0.3: U4.10@45.13,36.84 45.13,33.93 R19.1 45.2,33.9 R18.2
NetU4_6: U4.6 U4.7 | length 6.6
  Top Layer w0.25: U4.6@43.86,42.16 42.59,42.16 42.59,45.09 43.25,45.75 44.7,45.75
NRST: P2.8 P3.3 R11.1 U1.7 | length 108.3
  Top Layer w0.25: P2.8 6.5,8.85 6.5,6.65 7.15,6 13.292,6 13.88,6.587 13.88,11.075 18.15,15.345 18.15,18.381 24.481,24.712 33.019,24.712 33.384,25.077 34.239,25.077 34.266,25.05 38.673,25.05 39.073,24.65 39.073,23.677 42,20.75 U1.7 42,13.652 43.407,12.245 44.367,12.245 47,9.612 47,6.25 44.55,3.8 40.4,3.8 38.073,6.127 38.073,8.44 35.762,10.75 v1(32.65,10.75) ; P3.3 23.14,4.987 24.167,6.014 24.167,7.467 23.75,7.885 v1(23.75,8.95)
  Bottom Layer w0.25: v1(23.75,8.95) 24.05,9.25 31.15,9.25 v1(32.65,10.75) ; v1(42.05,19.2) 42.25,19 R11.1
NTRST: P2.2 R25.2 U1.56 | length 41.4
  Top Layer w0.25: R25.2@7.85,18.6 R25.2 P2.2@8.05,16.6 ; v1(17.65,11.7) 17.65,12 20.187,14.537 20.187,17.537 25.35,22.7 32.15,22.7 32.723,22.127 34.661,22.127 35.688,21.1 U1.56
  Bottom Layer w0.25: P2.2 8.25,16.5 9.298,15.452 10.544,15.452 11.102,14.894 11.102,13.648 12.295,12.455 16.895,12.455 v1(17.65,11.7)
OP+: U4.3 | length 14.2
  Top Layer w0.25: 40.7,44.8 40.7,46.9 41.1,47.3 46.1,47.3 46.6,46.8 46.6,45.8 47.4,45.8 47.67,45.53 U4.3
RTCK: P2.6 R20.2 | length 4.1
  Top Layer w0.25: R20.2 7,11.35 P2.6
RTCOSC1: C17.2 U1.3 X1.1 | length 5.9
  Top Layer w0.25: v3(39.4,13.65) 40,14.25 U1.3
  Bottom Layer w0.25: C17.2 X1.1 v3(39.4,13.65)
RTCOSC2: C18.2 U1.4 X1.2 | length 6.8
  Top Layer w0.25: v3(40.45,13.65) 40.5,13.7 U1.4
  Bottom Layer w0.25: v3(40.45,13.65) 41.35,13.65 41.9,13.1 X1.2 C18.2
RTS: P1.6
RX: P1.4 R4.1 | length 3
  Top Layer w0.25: 2.9,37.12 4.02,36 R4.1
SCK1: AS1.7 U1.21 | length 49.2
  Top Layer w0.25: U1.21 62.031,19.1 70.683,10.448 74.117,10.448 75.752,12.083 75.752,22.565 77.024,23.837 77.976,23.837 78.577,23.236 78.577,21.783 77.55,20.755 AS1.7
SCK2: AS1.10 AS1.18 U1.34 | length 90.9
  Top Layer w0.25: AS1.18 4.37,24.58 6.948,22.002 20.064,22.002 23.981,25.919 32.519,25.919 32.884,26.285 34.104,26.285 38.699,30.88 43.401,30.88 46,28.281 U1.34 ; v1@42.85,31 v1(42.942,31.092) ; v1(53.5,28.05) 53.72,28.27 55.287,28.27 55.935,28.918 55.935,29.165 58.759,31.99 75.31,31.99 76.1,31.2 76.1,29.24 AS1.10@77.45,27.89
  Bottom Layer w0.25: v1(42.942,31.092) 43.31,31.46 49.567,31.46 52.976,28.05 v1(53.5,28.05)
SCL1: R1.2 U1.61 U2.6 | length 12.2
  Top Layer w0.25: R1.2 30.477,15.573 30.477,17 30.892,17.415 U2.6 34.865,17.415 36.05,18.6 U1.61
SD_CS: AS1.15 U1.33 | length 63.9
  Top Layer w0.25: AS1.15 2.8,19.3 2.8,25.65 5.277,28.127 9.456,28.127 11.427,26.156 11.427,24.473 13.495,22.405 19.898,22.405 23.814,26.322 32.352,26.322 32.718,26.687 33.937,26.687 39.002,31.752 43.098,31.752 46.5,28.35 U1.33
SDA1: R2.1 U1.62 U2.5 | length 7.8
  Top Layer w0.25: R2.1 32.7,14.8 32.05,15.45 U2.5 34.164,16.145 36.119,18.1 U1.62
T_CS: AS1.11 U1.30 | length 37.6
  Top Layer w0.25: U1.30 49.444,23.6 49.571,23.473 50.939,23.473 51.277,23.811 51.277,24.323 50.3,25.3 50.3,27.269 51.704,28.673 55.12,28.673 55.532,29.085 55.532,29.332 58.593,32.393 76,32.393 77.45,30.943 AS1.11@77.45,30.43
T_IRQ: AS1.14 U1.37 | length 41.3
  Top Layer w0.25: v1(43.9,28.25) 44.5,27.65 U1.37 ; v1(49.75,28.75) 50.5,28.75 52.029,30.279 54.771,30.279 58.093,33.6 73.9,33.6 77.45,37.15 AS1.14@77.45,38.05
  Bottom Layer w0.25: v1(43.9,28.25) 45.5,29.85 48.9,29.85 49.4,29.35 49.4,29.1 v1(49.75,28.75)
TCK: P2.5 R22.2 U1.49 | length 37.1
  Top Layer w0.25: 10.65,13 R22.2 ; v1(15.5,11.25) 15.5,11.557 18.98,15.037 18.98,18.037 24.85,23.907 34.457,23.907 35.15,24.6 U1.49
  Bottom Layer w0.25: P2.5 11,11.65 15.1,11.65 v1(15.5,11.25)
TDI: P2.3 R24.2 U1.50 | length 45.3
  Top Layer w0.25: P2.3@10.14,14.49 9.198,13.548 9.198,10.106 9.806,9.498 11.602,9.498 R24.2 ; v1(16.85,11.45) 16.85,11.769 19.785,14.704 19.785,17.704 25.183,23.102 33.781,23.102 34.161,22.723 34.639,22.723 34.977,23.061 34.977,23.477 35.6,24.1 U1.50
  Bottom Layer w0.25: P2.3 10.7,13.95 10.7,13.481 12.129,12.052 16.248,12.052 v1(16.85,11.45)
TDO: P2.7 R21.1 U1.55 | length 39.4
  Top Layer w0.25: P2.7 10.75,9.9 R21.1 ; v1(14.7,11.05) 14.7,11.326 18.552,15.179 18.552,18.214 24.648,24.31 33.81,24.31 v1(34,24.5) ; v1(35.45,22.7) 35.45,22.25 36.1,21.6 U1.55
  Bottom Layer w0.25: 10.7,11.05 v1(14.7,11.05) ; v1(34,24.5) 33.823,24.323 33.823,23.061 34.161,22.723 35.427,22.723 v1(35.45,22.7)
TMS: P2.4 R23.2 U1.46 | length 62
  Top Layer w0.2: 37.55,27.6 37.79,27.6 38.242,28.052 39.437,28.052 39.892,27.598 39.95,27.598 40,27.548 U1.46
  Top Layer w0.25: P2.4@7.85,14.2 7.85,13.65 7.65,13.45 R23.2 4.5,12.905 3.723,12.127 3.723,8.377 6.502,5.598 13.459,5.598 16.077,8.216 16.077,11.566 19.382,14.871 19.382,17.871 25.017,23.505 34.195,23.505 v1(34.4,23.3) ; v1(35.95,26) 37.55,27.6
  Bottom Layer w0.25: v1(34.4,23.3) 35.5,24.4 35.5,25.55 v1(35.95,26)
TX: P1.5 R3.1 | length 4
  Top Layer w0.25: P1.5 4.21,37.55 R3.1@5.25,37.55
V+_LOAD: Q1.D R18.1 | length 88.9
  Top Layer w0.3: R18.1 44.263,32.4 43.629,33.035 43.265,33.035 41.6,34.7 41.6,37.9 42.927,39.227 51.027,39.227 52.4,40.6 52.4,54.2 49.5,57.1
  Top Layer w2: 49.5,57.1 50,57.6 Q1.D
  Top Layer w5: 15.75,63.2 26.75,52.2 44.6,52.2
  Top Layer w6: 9.8,63.2 15,63.2 ; 44.6,52.2 49.5,57.1
V_LOAD: U1.10 U4.8 U4.9 | length 37.8
  Top Layer w0.25: U4.8@42.59,36.84 43.86,36.84 43.9,36.88 43.9,37.7 45,38.8 51.2,38.8 52.352,37.648 52.352,33.033 48.185,28.866 48.185,28.065 v1(48.4,27.85) ; U1.10 43.5,19.3 v1(43.95,19.75)
  Bottom Layer w0.25: v1(43.95,19.75) 44.05,19.75 44.323,20.023 44.323,23.873 48.3,27.85 v1(48.4,27.85)
pads on no net: AS1.0 H.0 P4.1 R15.0 S1.0 U1.2 U1.24 U1.38 U1.39 U1.40 U1.51 U1.52 U1.53 U1.54 U1.57 U2.7 U5.5

## Polygon pours and split planes (outlines as drawn)
GND on Bottom Layer "Bottom Layer-No Net" (solid, remove dead copper, pour order 4): 26,69 26,29 23,26 12,26 12,17 1,17 1,1 99,1 99,69 70,69 70,79 30,79 30,69
GND on Bottom Layer "HighI" (solid, remove dead copper, pour order 2): 5,27 5,44 1,44 1,69 25.2,69.1 25.2,29.8 25.25,29.75 22.5,27

## Other copper
Top Layer:
  rectangle net AUX4: 52.3,23.1 54.05,24.15
  rectangle net AUX3: 52.3,21.7 54.05,22.75
  rectangle net AUX2: 47.7,13.85 49.45,14.9
  rectangle net AUX1: 47.7,11.7 49.45,12.75
  rectangle net CURR_DAC: 38.3,43.8 39.3,45.7
  rectangle net OP+: 40.2,43.8 41.2,45.7
  rectangle net OP+: 46.1,45 47.1,46.9
  rectangle net NetU4_6: 44.2,45 45.2,46.9
  rectangle net V+_LOAD: 5.5,55.1 11.7,69.1
  rectangle net 3_3V: 93,64.5 99,69
  rectangle net 3_3V: 74,60.35 88.75,69
  rectangle net 3_3V: 88.4,61 93,69
  rectangle net 3_3V: 62,58 74,63
  rectangle net 3_3V: 74,58 80,61
Bottom Layer:
  rectangle net 3_3V: 89.2,64.2 99,69
  rectangle net 3_3V: 78.95,40 89.15,56.05
  rectangle net 3_3V: 75,63 90,69
  rectangle net 3_3V: 75,56.05 88.1,63
  rectangle net 3_3V: 66,56.05 75,64

## Silkscreen, mask and mechanical layers (free items; w line width, h text height)
Top Overlay:
  drawing of 12 lines, arcs and shapes, not listed
  text "PWM" at 44.45,47.45 h0.9
  text "DAC" at 38.6,46.2 h0.9
  text "LCD TOUCH PANEL" at 8.35,43.8 h0.9
  text "REV. A" at 96.2,25.65 h2 r90
  text "SD_SCK" at 6.25,24.8 h0.9
  text "AUX4" at 54.5,23.25 h0.9
  text "AUX3" at 54.5,21.8 h0.9
  text "2015-01-19" at 99,18.9 h2 r90
  text "AUX2" at 49.8,13.95 h0.9
  text "AUX1" at 47.75,10.55 h0.9
  text "BOOT0" at 21.25,8.4 h1.5 r90
  text "NRST" at 23.85,8.4 h1.5 r90
Bottom Overlay:
  text "RX" at 3.6,36.65 h0.9
  text "BOOT0" at 19.75,8.4 h1.5 r270
  text "NRST" at 22.35,8.4 h1.5 r270
Mechanical 2:
  the board outline again, w0.2

## Text inside footprints (layer, text, board x,y; h text height)
AS1: Top Overlay "VCC" at 76.1,5.85 h0.9 r180; Top Overlay "GND" at 76.407,7.951 h0.9 r180; Top Overlay "CS" at 76.407,10.618 h0.9 r180; Top Overlay "RESET" at 76.407,12.904 h0.9 r180; Top Overlay "D/C" at 76.407,15.571 h0.9 r180; Top Overlay "SDI(MOSI)" at 76.407,18.238 h0.9 r180; Top Overlay "SCK" at 76.407,20.905 h0.9 r180; Top Overlay "LED" at 76.407,23.191 h0.9 r180; Top Overlay "SDO(MISO)" at 76.407,25.858 h0.9 r180; Top Overlay "T_CLK" at 76.407,28.525 h0.9 r180; Top Overlay "T_CS" at 76.407,30.811 h0.9 r180; Top Overlay "T_DIN" at 76.407,33.478 h0.9 r180; Top Overlay "T_DD" at 76.407,35.764 h0.9 r180; Top Overlay "T_IRQ" at 76.45,37.8 h0.9 r180; Top Overlay "CS" at 5.55,17.3 h0.9; Top Overlay "SD_MOSI" at 5.95,19.762 h0.9; Top Overlay "SD_MISO" at 6.25,22.35 h0.9; Top Overlay "SD_SCK" at 4.8,27 h0.9 r90